# Altium PCB USBPhyRW_1215.PcbDoc
Units mil, origin at the board's own origin, x right, y up, seen from the top; angles counter-clockwise.
Board outline 2170 x 955 mil, 2 copper layers (Top Layer, Bottom Layer); 39 components, 26 nets, 143 pads, 49 vias.
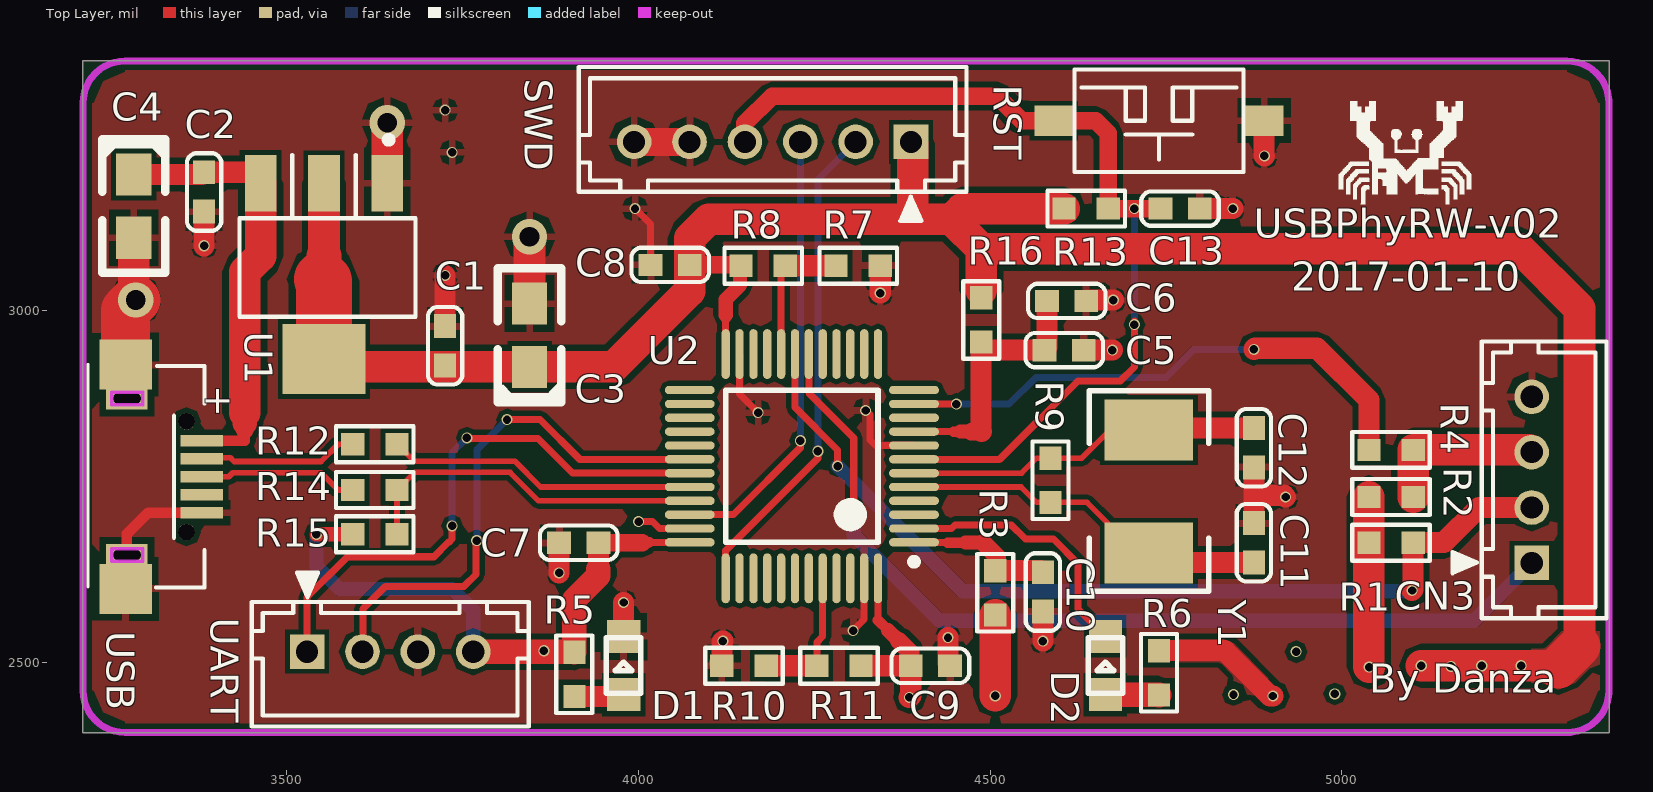
[diagram p0: Top Layer view]
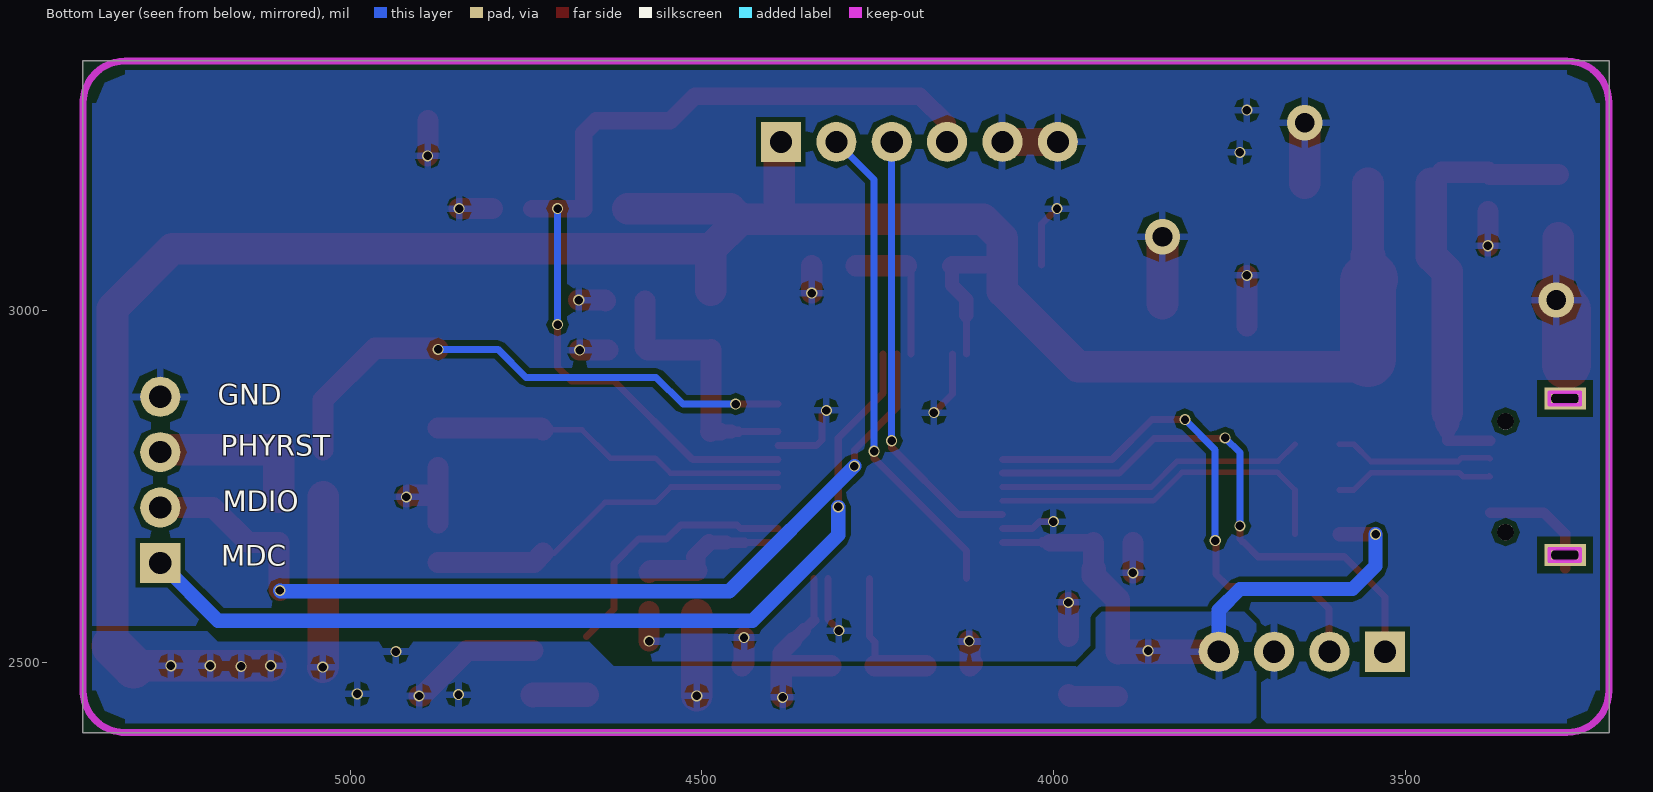
[diagram p1: Bottom Layer view, seen from below]

## Layer stack, top to bottom
Top Solder: solder mask 0.4, Solder Resist, Dk 3.5
Top Layer: signal copper 1.4
Dielectric 1: dielectric 12.6, FR-4, Dk 4.8
Bottom Layer: signal copper 1.4
Bottom Solder: solder mask 0.4, Solder Resist, Dk 3.5

## Board outline
4045,3355 5380,3355 5380,2420 5380,2410 5380,2400 3210,2400 3210,3345 3210,3355

## Design rules (kind name [scope] priority, off if disabled: settings)
Clearance [All] p1: gap=7
ComponentClearance [All] p1: gap=3 collisioncheckmode=3 verticalgap=7 showdistances=FALSE
DiffPairsRouting [All] p1: maxlimit=8 minlimit=8 mostfreqgap=8 toplayer_minwidth=8 toplayer_maxwidth=30 toplayer_prefwidth=15 bottomlayer_minwidth=8 bottomlayer_maxwidth=30 bottomlayer_prefwidth=15 maxuncoupledlength=500
PolygonConnect [All] p1: connectstyle=Relief reliefconductorwidth=10 reliefentries=4 polygonreliefangle="90 Angle" airgapwidth=10
RoutingVias [All] p1: holewidth=28 width=50 viastyle="Through Hole" minholewidth=10 minwidth=10 maxholewidth=100 maxwidth=100
SilkToSilkClearance [All] p1 off: silktosilkclearance=10
SolderMaskExpansion [All] p1: expansion=4
Width [All] p1: maxlimit=100 minlimit=8 preferedwidth=10 minimp=50.000000 maximp=50.000000 favimp=50.000000
27 further rules are at their usual default settings.

## Classes and differential pairs
component class CoreBoard: C1 C2 C3 C4 C5 C6 C7 C8 C9 C10 C11 C12 C13 CN3 D1 D2 R1 R2 R3 R4 R5 R6 R7 R9 R10 R12 R13 R14 r16 RST SWD U1 UART USB Y1
differential pair CLK8M: +OSC_OUT -OSC_IN
differential pair USB_2: +DM_PA11 -DP_PA12
differential pair USB_1: +NetR12_2 -NetR14_2

## Components (designator, comment, footprint, x,y, rotation, side; value= is the part's Value field where it differs from the comment)
C1 "0.1uf" C0603 3725,2950 r90 top
C2 "0.1uf" C0603 3382.24,3168.74 r270 top
C3 "10uf" SMD-CT-2012 3845,2920 r90 top
C4 "10uf" SMD-CT-2012 3282.24,3193.74 r270 top
C5 "1uf" C0603 4605.2,2943.74 r0 top
C6 "0.1uf" C0603 4608.74,3013.74 r0 top
C7 "0.1uf" C0603 3915,2670 r180 top
C8 "0.1uf" C0603 4045,3065 r180 top
C9 "0.1uf" C0603 4415,2495 r0 top
C10 "0.1uf" C0603 4575,2600 r270 top
C11 "20pF" C0603 4875,2670 r90 top
C12 "20pF" C0603 4875,2805 r90 top
C13 "0.1uf" C0603 4770,3145 r180 top
CN3 "CN_UART" CON_SIP4BOX_2MM 5271.97,2641.26 r90 top
D1 "LED-GREEN" LED-0805 3978.74,2492.76 r270 top
D2 "LED-GREEN" LED-0805 4663.74,2492.76 r270 top
R1 "1.5K/NC" R0603 5070,2670 r180 top
R2 "50k/NC" R0603 5070,2735 r0 top
R3 "0R/NC" R0603 4507.24,2598.74 r270 top
R4 "0R" R0603 5070,2802 r0 top
R5 "1K" R0603 3908.74,2482.76 r270 top
R6 "1K" R0603 4740,2485 r270 top
R7 "10K" R0603 4312.24,3063.82 r180 top
R8 "10K/NC" R0603 4177.24,3063.82 r180 top
R9 "1M" R0603 4585.75,2758.74 r270 top
R10 "10K" R0603 4150,2495 r0 top
R11 "10K/NC" R0603 4285,2495 r0 top
R12 "20R" R0603 3625,2810 r180 top
R13 "10K" R0603 4636.5,3145 r180 top
R14 "20R" R0603 3625,2745 r180 top
R15 "4K7" R0603 3625,2682 r0 top
R16 "0R" R0603 4487.24,2986.74 r270 top (schematic designator L1)
RST "KEYPAD/NC" SWITCH_T06B 4740,3270 r180 top (schematic designator SW1)
SWD "DNP/NC" CON_SIP6BOX_2MM 4387.48,3241.97 r180 top
U1 "LM1117-3.3V" SOT-223 3560,3060 r180 top
U2 "STM32F101C8T6" LQFP48_N 4232.24,2778.74 r180 top
UART "CN_UART/NC" CON_SIP4BOX_2MM 3528.78,2513.03 r0 top (schematic designator CN1)
USB "MICROUSB" MICRO-USB 3292.24,2763.74 r270 top
Y1 "8M" 5032-2P 4725.75,2743.74 r270 top

## Footprints (in the part's own frame and the unit in brackets; to place one, negate y for a bottom-side part, rotate by r counter-clockwise, add the part's x,y. Pads: shape width x height; smd on the part's side, far side on the other; paste and mask are expansions set on the pad)
5032-2P [mm]
  rect 2.2x3.2 smd: 1(-2.2,0) 2(2.25,0)
  silkscreen extent -3.62,-2.16 3.62,2.16
C0603 [mm]
  rect 0.86x0.8 smd: 1(-0.71,0) 2(0.71,0)
  silkscreen extent -1.4,-0.62 1.4,0.62
CON_SIP4BOX_2MM [mm]
  rect 1.25x1.25 / inner rect 1.25x1.25 / far side rect 1.45x1.45 hole 0.8: 1(0,0.05)
  round 1.25 / inner round 1.25 / far side round 1.45 hole 0.8: 2(2,0.05) 3(4,0.05) 4(6,0.05)
  silkscreen extent -2,-2.65 8,2.91
CON_SIP6BOX_2MM [mm]
  rect 1.25x1.25 / inner rect 1.25x1.25 / far side rect 1.45x1.45 hole 0.8: 1(0,0.05)
  round 1.25 / inner round 1.25 / far side round 1.45 hole 0.8: 2(2,0.05) 3(4,0.05) 4(6,0.05) 5(8,0.05) 6(10,0.05)
  silkscreen extent -2,-2.65 12,2.91
LED-0805 [mm]
  rect 1.2x1.2 smd: 1(-1.116,0.003) 2(0.984,0.003)
  silkscreen extent -1.07,-0.62 0.93,0.63
LQFP48_N [mm]
  oval 1.8x0.3 smd: 1(-4.05,2.75) 2(-4.05,2.25) 3(-4.05,1.75) 4(-4.05,1.25) 5(-4.05,0.75) 6(-4.05,0.25) 7(-4.05,-0.25) 8(-4.05,-0.75) 9(-4.05,-1.25) 10(-4.05,-1.75) 11(-4.05,-2.25) 12(-4.05,-2.75) 25(4.05,-2.75) 26(4.05,-2.25) 27(4.05,-1.75) 28(4.05,-1.25) 29(4.05,-0.75) 30(4.05,-0.25) 31(4.05,0.25) 32(4.05,0.75) 33(4.05,1.25) 34(4.05,1.75) 35(4.05,2.25) 36(4.05,2.75)
  oval 0.3x1.8 smd: 13(-2.75,-4.05) 14(-2.25,-4.05) 15(-1.75,-4.05) 16(-1.25,-4.05) 17(-0.75,-4.05) 18(-0.25,-4.05) 19(0.25,-4.05) 20(0.75,-4.05) 21(1.25,-4.05) 22(1.75,-4.05) 23(2.25,-4.05) 24(2.75,-4.05) 37(2.75,4.05) 38(2.25,4.05) 39(1.75,4.05) 40(1.25,4.05) 41(0.75,4.05) 42(0.25,4.05) 43(-0.25,4.05) 44(-0.75,4.05) 45(-1.25,4.05) 46(-1.75,4.05) 47(-2.25,4.05) 48(-2.75,4.05)
  silkscreen extent -4.18,-2.75 2.75,3.57
MICRO-USB [mm]
  rect 0.4x1.55 smd: 1(-1.3,2.2) 2(-0.65,2.2) 3(0,2.2) 4(0.65,2.2) 5(1.3,2.2)
  rect 1.8x1.9 smd: 6(-4.05,-0.55) 6(4.05,-0.55)
  rect 0.8x1.5 hole 0.4 slot 1 at 90 deg: 6(-2.825,-0.5) 6(2.825,-0.5)
  round 0.6 hole 0.6 unplated: ""(-2,1.65) ""(2,1.65)
  Keep-Out Layer lines w0.127: 3.054,-1.043 3.054,0.075 2.596,0.075 2.596,-1.043 3.054,-1.043 ; -2.596,-1.043 -2.596,0.075 -3.054,0.075 -3.054,-1.043 -2.596,-1.043
  silkscreen extent -4.06,-1.91 4,2.3
R0603 [mm]
  rect 0.84x0.8 smd: 1(-0.8,0) 2(0.8,0)
  silkscreen extent -1.4,-0.65 1.4,0.65
SMD-CT-2012 [mil]
  rect 60x50 smd: 1(0,0) 2(90,0)
  silkscreen extent -50,-45 140,45
SOT-223 [mil]
  rect 45x80 smd: 1(-82.76,-121.26) 2(7.24,-121.26) 3(97.24,-121.26)
  rect 118x100 smd: 4(7.24,128.74)
  silkscreen extent -123,-188 127,69
SWITCH_T06B [mm]
  rect 1.4x1.1 smd: 1(-3.8,0) 2(3.8,0)
  silkscreen extent -3.05,-1.85 3.05,1.85

## Part data
C1 C2 C5 C6 C7 C8 C9 C10 C13: library part CAP_1, "Capacitor"
C3 C4: library part CAPACITOR, "Capacitor"
C11 C12: library part CAP, "Capacitor"
CN3 UART: library part CON4
D1 D2: library part LED
R1 R2 R3 R4 R5 R6 R7 R8 R9 R10 R11 R12 R13 R14: library part RES1
R16: library part INDUCTOR1
RST: library part PUSHBUTTON_TSKB-2L_0
SWD: library part CON6
U1: library part LM1117
U2: "STM32 ARM-based 32-bit MCU with 64 Kbytes Flash, 48-pin LQFP, Industrial Temperature"
Y1: library part CRYSTAL, "Crystal"

## Via types
v1: diameter 15.75, hole 12, Top Layer to Bottom Layer, 46 vias
v2: diameter 50, hole 28, Top Layer to Bottom Layer, 3 vias

## Nets (pads, with @x,y where several pads share a name; then routed paths per layer and width w, separated by ;. In a path a pad name is that pad's centre, name@x,y a point inside that pad or via, vN(x,y) a via of type N, cw(c..) or ccw(c..) an arc to the next point about the centre after c; other vN are vias at no path point)
BOOT0: R10.2 R11.1 U2.44 | length 199.7
  Top Layer w10: R11.1 4253.5,2528.5 4261.77,2536.77 U2.44
  Top Layer w30: R10.2 R11.1
BOOT1: R7.2 R8.1 U2.20 | length 200.1
  Top Layer w10: U2.20 4202.72,3057.8 R8.1
  Top Layer w30: R8.1 R7.2
DM_PA11: R12.1 U2.32 | length 441.5
  Top Layer w8: R12.1 3680.5,2786 3824,2786 3860.79,2749.21 U2.32
DP_PA12: R14.1 R15.2 U2.33 | length 506.4
  Top Layer w8: R15.2 R14.1 3681.5,2770 3817.37,2770 3857.84,2729.53 U2.33
GND: C1.2 C2.2 C3.2 C4.2 C5.2 C6.2 C7.2 C8.2 C9.2 C10.2 C11.2 C12.1 C13.1 CN3.4 D1.1 R7.1 R10.1 RST.1 SWD.5 SWD.6 U1.1 U2.8 U2.23 U2.35 U2.47 UART.3 USB.5 USB.6 | length 1742.8
  Top Layer w10: v1(3995,3145) 4017.05,3122.95 C8.2 ; v1(4000,2700) 4020,2700 4029.84,2690.16 U2.35 ; U2.23 4143.66,2881.34 v1(4170,2855) ; v1(4305,2545) 4320.83,2560.83 U2.47 ; v1(4323,2858) 4329,2852 4329,2816 4336.73,2808.27 U2.8
  Top Layer w15: USB.6@3272.56,2633.52 3272.56,2652.52 3272.56,2682.56 3302.56,2712.56 USB.5
  Top Layer w30: v1(3382.24,3092.24) C2.2 ; C1.2 v1(3725,3050) ; v1(3887.05,2627.05) C7.2 ; D1.1 v1(3978.86,2585) ; R10.1@4115,2498.5 R10.1 4118.5,2528.5 v1(4120,2530) ; v1(4343.74,3025) R7.1 ; v1(4440,2535) 4440,2497.95 C9.2 ; v1(4575,2530) C10.2 ; C5.2 v1(4673.74,2943.74) ; C6.2 4637.95,3015 v1(4675,3015) ; C13.1 v1(4845,3145) ; C11.2 4875,2737.5 ; C12.1 4875,2737.5 ; RST.1 4889.61,3220.39 v1(4890,3220) ; v1(4920,2735) 4917.5,2737.5 4875,2737.5
  Top Layer w40: SWD.6 SWD.5
  Top Layer w45: C4.2 3282.24,3017.76 v2(3285,3015) ; U1.1 v2(3642.76,3267.24) ; C3.2 v2(3845,3105)
  Top Layer w70: USB.6@3270.59,2923.19 3270.59,3000.59 v2(3285,3015)
  other v1: 3735,3225 3725,3285
NetD1_2: D1.2 R5.2 | length 71.3
  Top Layer w30: R5.2 3976.1,2451.26 D1.2
NetD2_2: D2.2 R6.2 | length 76.4
  Top Layer w35: D2.2 4739.49,2454.02 R6.2
NetQ1_1: 
NetR12_2: R12.2 USB.2 | length 227.8
  Top Layer w8: USB.2 3380.53,2791 3419.5,2791 3425,2785.5 3548.47,2785.5 3572.97,2810 R12.2
NetR14_2: R14.2 USB.3 | length 229
  Top Layer w8: USB.3@3380.12,2765 USB.3 3417.24,2763.74 3423,2769.5 3548.47,2769.5 3572.97,2745 R14.2
NRST: C13.2 R13.1 RST.2 SWD.4 U2.7 | length 1359.8
  Top Layer w10: U2.7 4513.58,2788.58 4625,2900 4685,2900 4705,2920 v1(4705,2980) v1@4705,2985
  Top Layer w25: SWD.4 4151.26,3266.26 4190,3305 4510,3305 4545,3270 RST.2 4650,3270 4667.99,3252.01 R13.1 v1(4705.02,3145) C13.2
  Bottom Layer w10: v1(4705,2980) v1(4705.02,3145)
OSC_IN: C11.1 R9.2 U2.5 Y1.2 | length 527.7
  Top Layer w8: U2.5 4544.03,2749.21 4566,2727.24 R9.2 4637.76,2727.24 4709.84,2655.16 Y1.2
  Top Layer w30: Y1.2 4738.86,2642.05 C11.1
OSC_OUT: C12.2 R9.1 U2.6 Y1.1 | length 509.8
  Top Layer w8: U2.6 4544.66,2768.9 4566,2790.24 R9.1 4630.24,2790.24 4670.35,2830.35 Y1.1
  Top Layer w30: Y1.1 4728.35,2832.95 C12.2
PC13: D2.1 U2.2 | length 377.5
  Top Layer w10: U2.2 4445.16,2690.16 4450,2695 4530,2695 4550,2675 4590,2675 4625,2640 4625,2575.55 D2.1
PHYRST: R4.1 U2.11 | length 781.5
  Top Layer w10: U2.11 v1@4452.32,2867.32
  Top Layer w30: v1(4875,2945) 4876.5,2946.5 4965,2946.5 5038.5,2872.99 R4.1
  Bottom Layer w10: v1(4452,2867) 4527,2867 4565,2905 4750,2905 4790,2945 v1(4875,2945)
PHYRST#: CN3.3 R2.2 R4.2 | length 241.5
  Top Layer w45: R2.2 R4.2 ; R4.2@5104.76,2798.74 R4.2 ; CN3.3 5266.74,2802 R4.2
RX1: U2.31 UART.1 | length 808.3
  Top Layer w10: UART.1 3528.78,2592.78 3586,2650 3709,2650 3730,2671 3731,2671 3735,2675 v1(3735,2694) ; v1(3756,2819) 3757,2818 3857,2818 3906.1,2768.9 U2.31
  Bottom Layer w10: v1(3735,2694) 3735,2798 v1(3756,2819)
SMIMDC: CN3.1 U2.18 | length 1332.3
  Top Layer w10: U2.18 4242.09,2882.91 4306,2819 v1(4306,2721)
  Bottom Layer w20: v1(4306,2721) 4306,2681 4428,2559 5187.74,2559 CN3.1
SMIMDIO: CN3.2 R1.1 U2.19 | length 1333.3
  Top Layer w10: U2.19 4222.4,2862.6 4283,2802 v1(4283,2779)
  Top Layer w30: v1(5100,2602) 5101.5,2603.5 R1.1 5145,2670 5195,2720 CN3.2
  Bottom Layer w20: v1(4283,2779) 4461,2601 5099,2601 v1(5100,2602)
SWCLK: SWD.2 U2.37 | length 697.2
  Top Layer w10: U2.37 4123.98,2658.98 4255,2790 v1(4255,2800)
  Bottom Layer w10: v1(4255,2800) 4255,3186.26 SWD.2
SWDIO: SWD.3 U2.34 | length 631.6
  Top Layer w10: U2.34 4134.84,2709.84 4230,2805 v1(4230,2815)
  Bottom Layer w10: v1(4230,2815) SWD.3
TX1: U2.30 UART.2 | length 763.9
  Top Layer w10: UART.2 3608,2515.48 3608,2576 3640,2608 3752,2608 3769,2625 3769,2672 v1(3770,2673) ; v1(3813,2845) 3860,2845 3916.42,2788.58 U2.30
  Bottom Layer w10: v1(3770,2673) 3770,2802 v1(3813,2845)
USB_5V: C2.1 C4.1 U1.3 USB.1 | length 625
  Top Layer w15: USB.1 3439.92,2814.92 3439.92,2829.92
  Top Layer w25: 3439.92,2829.92 3439.92,2839.92
  Top Layer w30: C4.1 3379.29,3193.74 C2.1 3447.32,3196.69 U1.3
  Top Layer w35: 3439.92,2839.92 3439.92,2854.92
  Top Layer w45: 3439.92,2854.92 3439.92,2909.92 3440,2910 3440,3055 3462.76,3077.76 U1.3
VBAT: C10.1 R3.1 U2.1 | length 216.4
  Top Layer w10: U2.1 4392.17,2670 4440,2670
  Top Layer w15: 4440,2670 4465,2670
  Top Layer w20: 4465,2670 4490,2670
  Top Layer w25: 4490,2670 4510,2650 4507.24,2647.24 R3.1
  Top Layer w30: R3.1 4572.72,2630.24 C10.1
VCC_3V3: C1.1 C3.1 C7.1 C8.1 C9.1 R1.2 R2.1 R3.2 R5.1 R6.1 R8.2 R11.2 R13.2 R15.1 R16.1 SWD.1 U1.2 U1.4 U2.24 U2.36 U2.48 UART.4 | length 5143.4
  Top Layer w10: 4015.47,2670.47 U2.36 ; U2.24 4123.98,2988.98 ; 4340.51,2560 U2.48
  Top Layer w15: 4005.47,2670.47 4015.47,2670.47 ; 4123.98,2988.98 4123.98,2993.98 ; 4340.51,2560 4355,2545.51
  Top Layer w20: v1(3542,2682) R15.1 ; 4005,2670 4005.47,2670.47 ; 4123.98,2993.98 4123.98,3015.98 4144.57,3036.57 R8.2@4144.57,3065 ; 4355,2545.51 4370,2530.51
  Top Layer w25: C7.1 4005,2670 ; C8.1 4144.57,3065 R8.2 ; 4370,2530.51 4387.05,2513.46 C9.1
  Top Layer w30: 3942.95,2632.05 C7.1 ; R11.2 C9.1 4387.05,2452.05 v1(4385,2450) ; R6.1 4833.5,2516.5 4898,2452 v1(4902,2452)
  Top Layer w35: UART.4 3907.99,2515 R5.1 3908.74,2588.74 3942.95,2622.95 3942.95,2632.05
  Top Layer w45: U1.4 3564.02,2920 C3.1 3965,2920 4072.95,3027.95 C8.1 4072.95,3102.95 4100,3130 4390,3130 ; 3552.76,3077.76 U1.2 ; SWD.1 4390,3237.48 4390,3130 ; R16.1@4487.24,3028.74 4487.24,3087.76 ; v1(4507.24,2452.24) R3.2 ; R13.2 4460,3145 4445,3130 ; R2.1 R1.2 5038.5,2493.5 v1(5039,2493) ; v1(5113,2495) v1(5199,2495) v1(5255,2495) 5306,2495 5308,2493 ; 5338,2523 5338,3003 5253.24,3087.76 4487.24,3087.76 ; 4390,3130 4445,3130 ; 4445,3130 4487.24,3087.76
  Top Layer w50: 3552.76,3047.24 3552.76,3077.76
  Top Layer w55: 3550,3044.49 3552.76,3047.24
  Top Layer w60: 5308,2493 5338,2523
  Top Layer w80: 3550,3044.49 3552.76,3041.73 U1.4
  Bottom Layer w20: v1(3542,2682) 3542,2637 3575,2604 3735,2604 3765,2574 UART.4
  other v1: 4846,2454 4990,2455 5155,2494 4935,2515 3865.4,2516.32
VDDA: C5.1 C6.1 R16.2 U2.9 | length 375.2
  Top Layer w10: U2.9 4447.95,2827.95
  Top Layer w15: 4447.95,2827.95 4457.95,2827.95
  Top Layer w20: 4457.95,2827.95 4472.95,2827.95
  Top Layer w25: 4472.95,2827.95 4487.95,2827.95
  Top Layer w30: 4487.95,2827.95 4487.24,2828.66 4487.24,2944.74 4488.24,2943.74 C5.1 4580.79,2947.28 C6.1
pads on no net: U2.3 U2.4 U2.10 U2.12 U2.13 U2.14 U2.15 U2.16 U2.17 U2.21 U2.22 U2.25 U2.26 U2.27 U2.28 U2.29 U2.38 U2.39 U2.40 U2.41 U2.42 U2.43 U2.45 U2.46 USB. USB.4

## Polygon pours and split planes (outlines as drawn)
GND on Top Layer "GND_L01_P010" (solid, remove dead copper, pour order 10): 3210,3355 3210,2400 5380,2400 5380,2406 5380,3355 5224,3355 3210,3355
VCC_3V3 on Top Layer "VCC_3V3_L01_P016" (solid, remove dead copper, pour order 16): 4901,2539 4904,2542 5321,2542 5359,2542 5367,2534 5368,2533 5368,2448 5366,2448 5331,2413 5327,2409 5139,2409 4903,2409 4901,2411
VCC_3V3 on Top Layer "VCC_3V3_L01_P018" (solid, remove dead copper, pour order 18): 4739.33,2540.03 4739,2539.7 4739,2413 5333,2413 5368,2448 5368,2544 4743.69,2544 4740,2540.31
VCC_3V3 on Bottom Layer "VCC_3V3_L02_P012" (solid, remove dead copper, pour order 12): 5375,2544 5203,2544 5188,2529 4962,2529 4660,2529 4628,2497 4625,2494 4518,2494 3968,2494 3967,2493 3940,2520 3940,2532 3940,2563 3939,2564 3931,2572 3780,2572 3729,2572 3718,2561 3712,2555 3712,2468 3712,2421 3730,2403 3731,2402 4616,2402 5374,2402
GND on Bottom Layer "GND_L02_P014" (solid, remove dead copper, pour order 14): 5381,2400 5381,3354 5380,3355 3210,3355 3210,2400 5381,2400

## Keep-outs
Keep-Out Layer:
  lines w10: 5320,2400 ccw(c5320,2460) 5380,2460 ; 5325,2400 3285,2400 3270,2400 cw(c3270,2460) 3210,2460 3210,2475 3210,3295 cw(c3270,3295) 3270,3355 5320,3355 cw(c5320,3295) 5380,3295 ; 5380,2455 5380,3300

## Silkscreen, mask and mechanical layers (free items; w line width, h text height)
Top Overlay:
  drawing of 673 lines, arcs and shapes, not listed
  text "USBPhyRW-v02" at 4875,3090 h70
  text "2017-01-10" at 4928,3015 h70
  text "By Danza" at 5039,2443 h70
Bottom Overlay:
  text "GND" at 5188,2856 h50
  text "PHYRST" at 5184,2784 h50
  text "MDIO" at 5181,2705 h50
  text "MDC" at 5183,2627 h50

## Text inside footprints (layer, text, board x,y; h text height)
USB: Top Overlay "+" at 3384.76,2893.66 h39.37 r270